# EAGLE board MySens-easyRS485-BluePill-V02-011 (EAGLE 7.6.0)
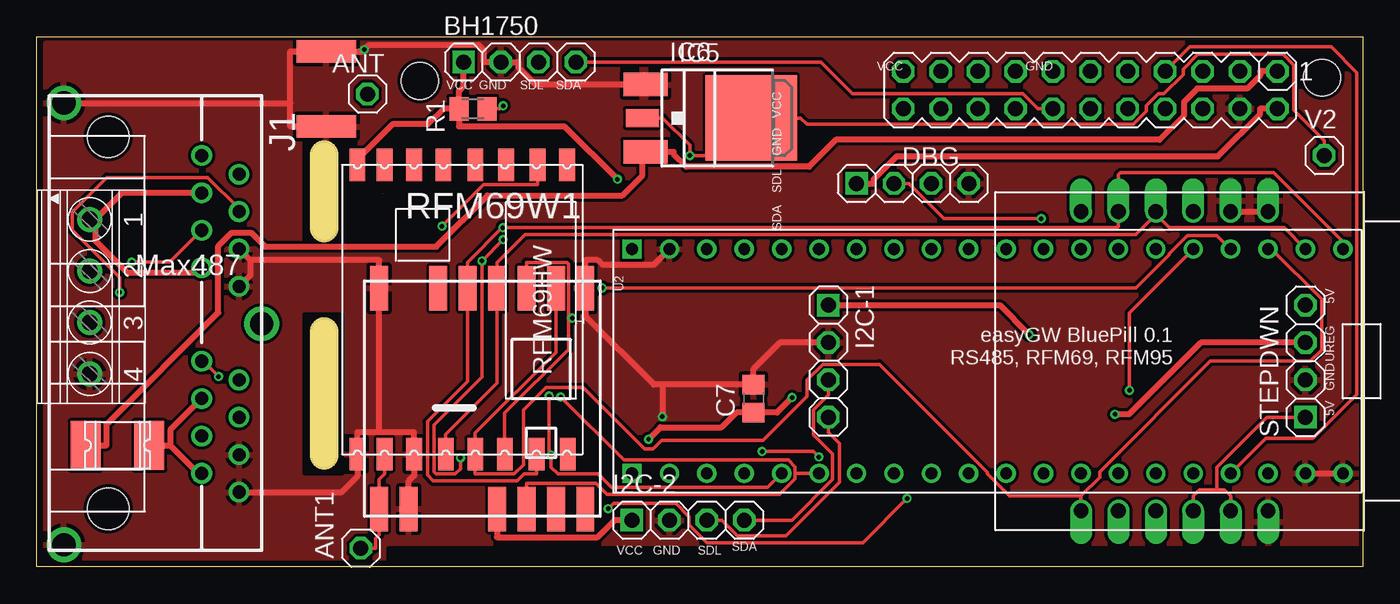
[diagram p0: board, top side]
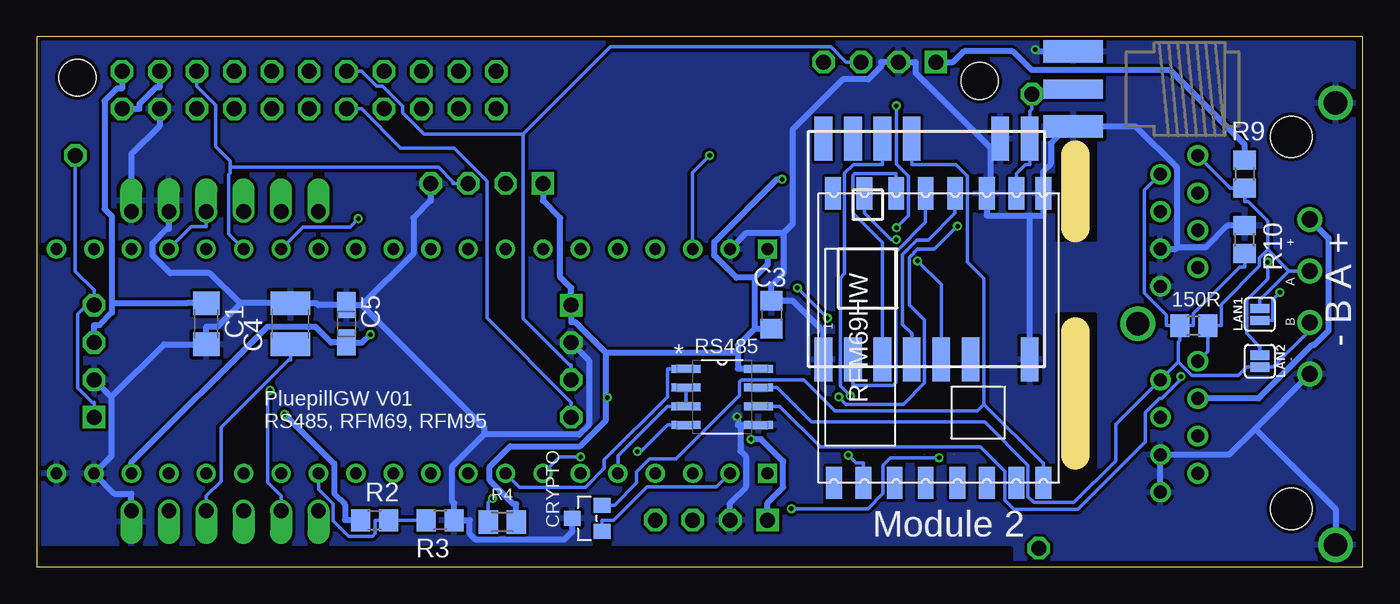
[diagram p1: board, bottom side, seen from below]

Size 90 x 36 mm. Coordinates in mm from the lower left corner, seen from the top.
Outline: 90,0 0,0 0,36 90,36 90,0
Copper layers (1*16): Top 0.035mm / dielectric 1.5mm / Bottom 0.035mm
Design rules "dirt_cheap_dirty_boards.v1": minimum track width 5mil, minimum drill 12mil, track to track 5mil, track to pad 5mil, pad to pad 5mil, via to via 5mil, smd to smd 0mil, copper to edge 10mil, drill to drill 10mil, minimum pad ring 10mil, minimum via ring 6mil, stop-mask expansion 2mil, vias tented up to drill 25mil, thermal gap 10mil
Net classes: 0 default: width 0.254 mm, clearance 0.205 mm; 1 PWR: width 0.406 mm, clearance 0.205 mm to class 0, clearance 0.205 mm
Holes 2.5 mm at 87.24,33.23 26,33
tRestrict: area 18.2,22.2 to 20.7,28.6; area 18.2,6.3 to 20.7,17.1; area 23.9,0.6 to 89.9,1.3; 1 lines
bRestrict: area 18.2,22.2 to 20.7,28.6; area 18.2,6.3 to 20.7,17.1; area 23.9,0.6 to 89.9,1.3
Milling: 2 lines

## Footprints (pad centres in the part's own frame; a part is rotated, then mirrored left to right if it is on the bottom)
1X01 = drill 1.016 octagon: 1 0,0
1X04-S = drill 1.016 square: 1 -3.81,0 | drill 1.016 octagon: 2 -1.27,0; 3 1.27,0; 4 3.81,0
C1206 = smd 1.6 x 1.8: 1 -1.4,0; 2 1.4,0
C0805 = smd 1.3 x 1.5: 1 -0.95,0; 2 0.95,0
C1210 = smd 1.6 x 2.7: 1 -1.4,0; 2 1.4,0
R/2012-12W = smd 1.75 x 1.26: + 1.275,0; - -1.275,0
SOT23 = smd 1.016 x 1.143: 1 -0.889,-1.016; 2 0.889,-1.016; 3 0,1.016
1812L = smd 2.03 x 3.3: P$1 -2.16,0; P$2 2.16,0
USR-ES1 = drill 1 pad 1.35 offset: 1 -10.16,5.715; 2 -10.16,3.175; 3 -10.16,0.635; 4 -10.16,-1.905; 5 -10.16,-4.445; 6 -10.16,-6.985; 7 10.16,-6.985; 8 10.16,-4.445; 9 10.16,-1.905; 10 10.16,0.635; 11 10.16,3.175; 12 10.16,5.715
DPACK = smd 1.6 x 3: 1 -2.28,-4.8; 3 2.28,-4.8 | smd 5.8 x 6.2: 4 0,2.38
SOT223 = smd 1.219 x 2.235: 1 -2.311,-3.099; 2 0,-3.099; 3 2.311,-3.099 | smd 3.6 x 2.2: TAB 0,3.099
RJ45_2X_NARROW_SHILDPINS_NOCASE = drill 0.889: 1-1 -11.43,6.35; 1-2 -10.16,8.89; 1-3 -8.89,6.35; 1-4 -7.62,8.89; 1-5 -6.35,6.35; 1-6 -5.08,8.89; 1-7 -3.81,6.35; 1-8 -2.54,8.89; 2-1 2.54,6.35; 2-2 3.81,8.89; 2-3 5.08,6.35; 2-4 6.35,8.89; 2-5 7.62,6.35; 2-6 8.89,8.89; 2-7 10.16,6.35; 2-8 11.43,8.89 | drill 1.575 pad 2.184: G1 -15,-3; G2 0,10.414; G3 15,-3 | hole 2.8: -12.7,0; 12.573,0
SMT-JUMPER_2_NC_PASTE_SILK = smd 0.635 x 1.27: 1 -0.406,0; 2 0.406,0
M0805 = smd 1.3 x 1.6: 1 -0.95,0; 2 0.95,0
R0805 = smd 1.3 x 1.5: 1 -0.95,0; 2 0.95,0
RFM = smd 2.184 x 1.067: ANT 19.651,2.889; DIO0 0,13.27; DIO1 0,11.143; DIO2 0,9.047; DIO3 0,6.889; DIO4 0,4.889; DIO5 0,2.889; GNDA 19.651,4.889; GNDB 19.651,1.048; MISO 19.651,9.047; MOSI 19.651,11.047; NC 19.651,15.334; NSS 19.651,13.206; RESET 0,15.27; SCK 19.651,7.048; VCC 0,1.048
SOIC127P600X175-8N = smd 1.981 x 0.533: 1 -2.464,1.905; 2 -2.464,0.635; 3 -2.464,-0.635; 4 -2.464,-1.905; 5 2.464,-1.905; 6 2.464,-0.635; 7 2.464,0.635; 8 2.464,1.905
MA11-2 = drill 1.016 octagon: 1 -12.7,-1.27; 2 -12.7,1.27; 3 -10.16,-1.27; 4 -10.16,1.27; 5 -7.62,-1.27; 6 -7.62,1.27; 7 -5.08,-1.27; 8 -5.08,1.27; 9 -2.54,-1.27; 10 -2.54,1.27; 11 0,-1.27; 12 0,1.27; 13 2.54,-1.27; 14 2.54,1.27; 15 5.08,-1.27; 16 5.08,1.27; 17 7.62,-1.27; 18 7.62,1.27; 19 10.16,-1.27; 20 10.16,1.27; 21 12.7,-1.27; 22 12.7,1.27
RFM69HCW-XXXS2 = smd 3 x 1.2: 3.3V 7.5,1; ANT 7.5,-7; DIO0 7.5,3; DIO1 7.5,5; DIO2 7.5,7; GND_1 7.5,-5; GND_2 -7.5,-7; GND_3 -7.5,7; MISO -7.5,5; MOSI -7.5,3; NSS -7.5,-1; RESET -7.5,-3; SCK -7.5,1
BLUEPILL = drill 0.8 square: P$1 -7.62,22.86; P$40 7.62,22.86 | drill 0.8: P$2 -7.62,20.32; P$3 -7.62,17.78; P$4 -7.62,15.24; P$5 -7.62,12.7; P$6 -7.62,10.16; P$7 -7.62,7.62; P$8 -7.62,5.08; P$9 -7.62,2.54; P$10 -7.62,0; P$11 -7.62,-2.54; P$12 -7.62,-5.08; P$13 -7.62,-7.62; P$14 -7.62,-10.16; P$15 -7.62,-12.7; P$16 -7.62,-15.24; P$17 -7.62,-17.78; P$18 -7.62,-20.32; P$19 -7.62,-22.86; P$20 -7.62,-25.4; P$21 7.62,-25.4; P$22 7.62,-22.86; P$23 7.62,-20.32; P$24 7.62,-17.78; P$25 7.62,-15.24; P$26 7.62,-12.7; P$27 7.62,-10.16; P$28 7.62,-7.62; P$29 7.62,-5.08; P$30 7.62,-2.54; P$31 7.62,0; P$32 7.62,2.54; P$33 7.62,5.08; P$34 7.62,7.62; P$35 7.62,10.16; P$36 7.62,12.7; P$37 7.62,15.24; P$38 7.62,17.78; P$39 7.62,20.32
SMA_EDGELAUNCH = smd 4.064 x 1.524: GND@1 2.032,-2.54; GND@2 2.032,2.54 | smd 4.064 x 1.524 bottom: GND@3 2.032,2.54; GND@4 2.032,-2.54 | smd 4.064 x 1.27: P 2.032,0
1751264 = drill 1.1 pad 1.7: 1 -5.25,-0.1; 2 -1.75,-0.1; 3 1.75,-0.1; 4 5.25,-0.1

## Placement (x,y rotation side)
ANT  [1X01]  22.45,32.12 0 top
ANT1  [1X01]  21.98,1.27 0 top
BH1750  [1X04-S]  32.78,34.29 0 top
C1  0.1uF  [C1206]  78.5,16.51 270 bottom
C3  22p  [C0805]  40.12,17.12 270 bottom
C4  10uF  [C1210]  72.78,16.51 90 bottom
C5  10uF  [R/2012-12W]  68.97,16.51 270 bottom
C7  22pF  [C0805]  48.66,11.43 90 top
CRYPTO  ATSHA204A  [SOT23]  52.64,3.3 90 bottom
DBG  [1X04-S]  59.45,26.04 0 top
F2  1812L  [1812L]  5.47,8.26 0 top
I2C-1  [1X04-S]  53.73,13.97 270 top
I2C-2  [1X04-S]  44.21,3.17 0 top
IC2  LAN-USR-ES1  [USR-ES1]  77.86,13.97 270 top
IC5  LD117ADT50TR  [DPACK]  46.12,30.48 270 top
IC6  LM1117MPX-ADJ  [SOT223]  44.21,30.48 270 top
J1  [RJ45_2X_NARROW_SHILDPINS_NOCASE]  4.84,16.51 270 top
LAN1  JUMPER-SMT_2_NC_PASTE_SILK  [SMT-JUMPER_2_NC_PASTE_SILK]  6.99,17.14 90 bottom
LAN2  JUMPER-SMT_2_NC_PASTE_SILK  [SMT-JUMPER_2_NC_PASTE_SILK]  6.99,13.97 270 bottom
R1  10k  [M0805]  29.61,31.11 180 top
R2  1M  [R0805]  67.07,3.17 0 bottom
R3  470K  [R0805]  62.62,3.17 180 bottom
R4  10k  [M0805]  58.41,3.05 0 bottom
R6  150R  [R0805]  11.46,16.38 180 bottom
R9  330R  [R0805]  8.02,26.67 270 bottom
R10  330R  [R0805]  8.02,22.23 90 bottom
RFM69W  RFM69HW  [RFM]  20.62,5.71 90 bottom
RFM69W1  RFM69HW  [RFM]  20.71,27.3 270 top
RS1  MAX487ECSA+  [SOIC127P600X175-8N]  43.48,11.54 0 bottom
STEPDWN  [1X04-S]  86.12,13.97 90 top
SV2  [MA11-2]  71.52,32.38 180 top
U1  RFM69HCW  [RFM69HCW-XXXS2]  29.61,21.59 90 bottom
U2  RFM69HCW  [RFM69HCW-XXXS2]  30.24,11.43 270 top
U$4  BLUEPILL  [BLUEPILL]  63.26,13.97 90 top
V2  [1X01]  87.39,27.94 0 top
X2  [SMA_EDGELAUNCH]  17.62,32.45 180 bottom
X3  1751264  [1751264]  3.69,18.35 270 top

## Library data of the parts
ANT ANT1 V2 = pinhead
BH1750 DBG I2C-1 I2C-2 STEPDWN = pinhead-2
C1 C3-C5 C7 R1-R4 R6 R9 R10 = rcl
CRYPTO = Sensor
F2 = ptc-littlefuse
IC2 = Martin-Communication
IC5 = v-reg
IC6 = lm1117
J1 = RJ45
LAN1 LAN2 = SparkFun-Jumpers
RFM69W RFM69W1 = hoperf
RS1 = Maxim_By_element14_Batch_1; MPN: MAX487ECSA+; OC_FARNELL: 9724532; OC_NEWARK: 68K4803; PACKAGE: SOIC-8; SUPPLIER: Maxim
SV2 = con-Pinheader; OC_FARNELL: unknown; OC_NEWARK: unknown
U1 U2 = doug
U$4 = stm32duino boards
X2 = adafruit
X3 = con-phoenix-350; MPN: 1751264; OC_FARNELL: unknown; OC_NEWARK: 10R0934

## Nets
3V3: CRYPTO.2 RFM69W.VCC U1.3.3V
4: J1.1-4 LAN1.1
5: J1.1-5 LAN2.1
5V: C4.1 IC2.10 IC2.11 IC5.4 IC6.2 IC6.TAB STEPDWN.1 STEPDWN.4 U$4.P$38 V2.1
A: J1.1-1 J1.2-1 LAN1.2 R6.1 R9.2 RS1.6 X3.2
A0: SV2.21
A1: SV2.22
A2: SV2.16
A3: SV2.15
A4: BH1750.4 I2C-1.4 I2C-2.3 SV2.14
A5: BH1750.3 I2C-1.3 I2C-2.4 SV2.13
A7: SV2.8
ANT: ANT.1 RFM69W.ANT U1.ANT X2.P
ANT1: ANT1.1 RFM69W1.ANT U2.ANT
B: J1.1-2 J1.2-2 LAN2.2 R6.2 R10.1 RS1.7 X3.3
CSN: R4.1 RFM69W.NSS U1.NSS
CSN1: U$4.P$9
CSN2: IC2.5 R1.1 RFM69W1.NSS U2.NSS U$4.P$21
D2: SV2.9
D3: SV2.10
D5: SV2.11
D6: SV2.12
D10_SS: SV2.20
D11_MOSI: SV2.17
D12_MISO: SV2.18
D13_SCK: SV2.19
GND [PWR]: BH1750.2 C1.2 C3.1 C4.2 C5.- C7.2 CRYPTO.3 DBG.4 I2C-1.2 I2C-2.2 IC2.1 IC2.2 IC2.12 IC5.1 IC6.1 J1.1-6 J1.1-8 J1.2-6 J1.2-8 J1.G1 J1.G3 R3.1 R10.2 RFM69W1.GNDA RFM69W1.GNDB RFM69W.GNDA RFM69W.GNDB RS1.5 STEPDWN.2 SV2.4 U1.GND_1 U1.GND_2 U1.GND_3 U2.GND_1 U2.GND_2 U2.GND_3 U$4.P$19 U$4.P$20 U$4.P$39 X2.GND@1 X2.GND@2 X2.GND@3 X2.GND@4 X3.4
IRQ: RFM69W.DIO0 RS1.2 RS1.3 U1.DIO0 U$4.P$5
IRQ2: RFM69W1.DIO0 U2.DIO0 U$4.P$6
MISO: RFM69W.MISO U1.MISO
MISO1: U$4.P$11
MISO2: IC2.7 RFM69W1.MISO U2.MISO U$4.P$23
MOSI: RFM69W.MOSI U1.MOSI
MOSI1: U$4.P$12
MOSI2: IC2.3 RFM69W1.MOSI U2.MOSI U$4.P$24
N$1: U1.RESET
N$4: U2.DIO2
N$8: U2.DIO1
N$9: U2.RESET
N$12: U$4.P$3
N$13: U$4.P$4
N$14: U1.DIO2
N$15: U1.DIO1
N$25: U$4.P$14
N$33: IC2.6
N$35: U$4.P$37
N$36: U$4.P$36
N$39: U$4.P$33
N$40: U$4.P$32
N$41: U$4.P$31
N$42: U$4.P$30
N$43: U$4.P$29
N$44: U$4.P$28
PB0: R2.2 R3.2 U$4.P$13
PC13: CRYPTO.1 U$4.P$2
RESET: SV2.7 U$4.P$17
RX0: SV2.6
RX1: DBG.2 U$4.P$27
RX2: RS1.1 U$4.P$8
SCK: RFM69W.SCK U1.SCK
SCK1: U$4.P$10
SCK2: IC2.4 RFM69W1.SCK U2.SCK U$4.P$22
SCL1: U$4.P$34
SCL2: U$4.P$15
SDA1: U$4.P$35
SDA2: U$4.P$16
TX1: DBG.3 SV2.5 U$4.P$26
TX2: RS1.4 U$4.P$7
UREG [PWR]: C1.1 F2.P$1 IC5.3 IC6.3 R2.1 STEPDWN.3 SV2.1
VCC [PWR]: BH1750.1 C3.2 C5.+ C7.1 DBG.1 I2C-1.1 I2C-2.1 R1.2 R4.2 R9.1 RFM69W1.VCC RS1.8 SV2.2 SV2.3 U2.3.3V U$4.P$18 U$4.P$40
VIN [PWR]: F2.P$2 J1.1-3 J1.1-7 J1.2-3 J1.2-7 X3.1
WIZ_RST: IC2.8 U$4.P$25

## Tracks (layer width: path | path; a pad name or v marks a point on that pad's centre or on a via)
3V3
  Bottom 0.254: 25.71,11.04 26.17,10.58 35.81,10.58 37.92,12.7 42.16,12.7 42.3,12.57 42.3,11.63 46.61,7.32 48.41,7.32 49.29,6.44 49.29,5.7 50.8,4.19 CRYPTO.2 | 25.71,11.04 21.73,7.06 21.67,7.06 RFM69W.VCC | 25.71,11.04 25.71,19.59 26.84,20.72 26.84,26.56 27.62,27.34 30.61,27.34 U1.3.3V
4  (via drill 0.3 pad 0.61)
  Top 0.254: v5.62,18.65 5.62,19.67 2.4,22.88 2.4,24.1 4.75,26.45 11.6,26.45 13.73,24.32 J1.1-4
  Bottom 0.254: v5.62,18.65 6.1,18.17 6.1,16.74 LAN1.1
5  (via drill 0.3 pad 0.61)
  Top 0.254: v6.45,20.7 9.03,20.7 J1.1-5
  Bottom 0.254: LAN2.1 6.99,14.95 7.87,15.84 7.87,18.11 6.45,19.54 v6.45,20.7
5V  (via drill 0.3 pad 0.61)
  Top 0.254: 80.09,5.25 78.93,5.25 78.5,4.82 IC2.10 | 80.09,5.25 80.61,5.25 81.04,4.82 IC2.11 | STEPDWN.1 83.48,10.16 80.09,6.77 80.09,5.25 | IC6.2 42.48,30.48 44.33,28.64 v44.33,27.94 46.83,27.94 47.31,28.43 IC6.TAB IC5.4 51.85,30.48 52.27,30.06 74.45,30.06 75.33,30.93 75.33,31.32 76.14,32.13 76.51,32.13 77.82,33.44 77.82,33.81 78.82,34.81 84.61,34.81 85.33,34.09 85.33,31.01 87.39,28.96 V2.1
  Bottom 0.254: C4.1 72.78,14.06 72.92,14.06 77.49,9.48 77.49,5.83 78.5,4.82 IC2.10 | U$4.P$38 45.48,26.79 v44.33,27.94 | STEPDWN.1 86.12,11.18 86.25,11.18 87.22,12.15 87.22,17.19 86.12,18.29 | 86.12,18.29 86.12,18.8 87.39,20.07 V2.1 | STEPDWN.4 86.12,18.29
A  (via drill 0.3 pad 0.61)
  Top 0.254: J1.2-1 11.3,13.97 v12.34,12.93
  Bottom 0.254: 6.44,21.54 5.01,20.1 | 6.44,21.54 6.44,23.5 7.76,24.82 8.02,24.82 R9.2 8.52,25.72 9.02,25.72 9.02,25.77 J1.1-1 | 6.44,21.54 7,20.98 7,20.43 9.61,17.82 9.61,16.38 R6.1 10.52,14.64 J1.2-1 | RS1.6 39.59,10.91 36.82,8.14 25.95,8.14 24.3,6.49 24.3,4.52 23.68,3.91 19.33,3.91 14.76,8.47 14.76,10.48 13.81,11.43 13.63,11.43 12.34,12.72 v12.34,12.93 | 5.01,20.1 6.99,18.12 LAN1.2 | X3.2 5.01,20.1
A4
  Top 0.254: SV2.14 67.96,31.11 66.94,32.13 55.37,32.13 53.22,34.29 BH1750.4 | I2C-2.3 46.5,3.17 47.56,2.11 50.84,2.11 54.48,5.75 54.48,8.4 53.73,9.14 I2C-1.4
  Bottom 0.254: I2C-1.4 53.73,11.18 59.45,16.89 59.45,26.22 61.68,28.45 65.29,28.45 67.96,31.11 SV2.14
A5
  Top 0.254: 49.04,3.17 51.26,3.17 54.02,5.93 54.02,7.67 52.72,8.97 52.72,10.67 53.73,11.68 I2C-1.3 | 49.04,3.17 | I2C-2.4 49.04,3.17
  Bottom 0.254: I2C-1.3 53.73,13.72 53.84,13.72 56.99,16.87 56.99,29.4 | 56.99,29.4 51.07,35.32 36.09,35.32 35.07,34.29 BH1750.3 | 56.99,29.4 63.7,29.4 65.17,30.86 65.17,31.29 66.51,32.64 66.94,32.64 67.96,33.66 SV2.13
ANT  (1 unrouted)
  Bottom 0.254: RFM69W.ANT 23.51,26.71 22.89,27.34 22.61,27.34 U1.ANT 22.61,30.94 22.45,31.1 ANT.1 21.43,32.12 21.09,32.45 X2.P
ANT1  (1 unrouted)
  Top 0.254: RFM69W1.ANT 23.6,6.31 23.24,5.94 U2.ANT 23.24,2.18 23,1.94 23,1.27 ANT1.1
B
  Bottom 0.254: 16.77,9.66 16.77,7.2 19.59,4.37 22.32,4.37 22.72,4.77 22.72,6.91 25.65,9.84 37.42,9.84 39.77,12.18 RS1.7 | 16.77,9.66 | 16.77,9.66 J1.2-2 12.51,13.92 | R6.2 13.32,16.38 13.32,17.11 14.82,18.61 14.82,25.58 J1.1-2 | R6.2 12.3,16.38 11.51,16.38 11.51,17.21 8.35,20.37 8.02,20.37 R10.1 | R6.2 12.41,16.15 12.41,15.38 12.51,15.28 12.51,13.92 | 12.51,13.92 11.61,13.01 8.43,13.01 7.87,13.56 LAN2.2 6.1,13.56 3.59,16.07 X3.3
CSN  (via drill 0.3 pad 0.61)  (1 unrouted)
  Top 0.254: v31.66,22.23 v30.22,20.79 30.22,12.89 26.98,9.64 26.98,6.44 27.11,6.31 28.4,6.31 28.76,6.67 v28.76,7.41 | v31.66,22.23 | v31.66,22.23 | v38.78,3.96 39.13,4.31 43.37,4.31 44.27,3.42 44.27,2.87 45.48,1.65 56.07,1.65 v59.08,4.65
  Bottom 0.254: v31.66,22.23 32.03,22.23 33.83,24.02 RFM69W.NSS | v59.08,4.65 59.35,4.37 R4.1 | v28.76,7.41 32.05,7.41 32.55,6.91 32.55,5 33.6,3.96 v38.78,3.96 | v30.22,20.79 28.61,19.17 U1.NSS
CSN2  (via drill 0.3 pad 0.61)  (1 unrouted)
  Top 0.254: U$4.P$21 88.66,22.1 83.98,26.78 73.55,26.78 73.42,26.65 IC2.5 73.42,23.12 73.33,23.04 v31.65,23.04 31.59,23.04 29.24,20.68 U2.NSS 29.24,12.6 26.52,9.87 26.52,6.24 26.91,5.84 32.59,5.84 33.06,6.31 33.92,6.31 RFM69W1.NSS | v31.66,31.32 31.46,31.11 R1.1
  Bottom 0.254: v31.66,31.32 31.66,27.35 30.83,26.53 30.83,23.85 v31.65,23.04
GND  (via drill 0.3 pad 0.61)
  Top 0.406: 42.46,12.38 41.88,12.38 37.24,17.02 U2.GND_3 37.24,20.84 38.08,20.84 38.41,20.51 41.86,20.51 U$4.P$39 | 42.46,12.38 47.5,12.38 C7.2 48.66,13.44 50.46,15.24 I2C-1.2 | 42.46,12.38 v42.46,10.19 | U$4.P$19 U$4.P$20 | J1.2-8 20.69,5.08 21.76,6.15 RFM69W1.GNDB 21.76,9.15 23.24,9.15 | 23.24,9.15 25.6,9.15 RFM69W1.GNDA 25.6,6.15 25.55,6.15 25.24,5.84 U2.GND_1 | 23.24,9.15 U2.GND_2 23.24,20.84 14.48,20.84 | IC5.1 41.28,32.79 IC6.1 33.82,32.79 32.68,33.93 32.68,34.29 BH1750.2 30.34,34.29 30.34,35.12 30,35.46 22.56,35.46 v22.23,35.13 22.09,34.99 21.84,34.99 X2.GND@1 17.21,34.99 17.21,31.51 | IC2.2 IC2.1 | 14.48,20.84 J1.1-6 | 14.48,20.84 14.48,19.8 J1.1-8 | 17.21,31.51 17.21,29.91 X2.GND@2 | J1.G1 17.21,31.51
  Bottom 0.406: 39.33,22.66 38.69,23.29 38.69,29.7 35.27,33.12 33.56,33.12 32.68,34 32.68,34.29 BH1750.2 30.34,34.29 30.34,33.54 25.25,28.45 | I2C-2.2 42.94,4.34 41.87,5.41 41.87,7.51 42.23,7.88 42.23,9.64 | 42.23,9.64 42.41,9.64 42.41,10.14 v42.46,10.19 | 42.23,9.64 42.17,9.64 RS1.5 | U1.GND_3 36.6,16 38.68,18.07 C3.1 40.12,19.13 39.33,19.92 39.33,22.66 | 39.33,22.66 41.87,22.66 U$4.P$39 | 67.94,17.79 64.43,21.29 64.43,23.69 63.26,24.86 DBG.4 | 59.63,8.99 61.83,6.79 61.83,4.49 61.67,4.33 R3.1 60.62,3.17 60.62,2.25 60.21,1.84 54.2,1.84 53.66,2.38 CRYPTO.3 | I2C-1.2 52.53,14.03 52.53,9.65 53.19,8.99 59.63,8.99 | 67.94,17.79 59.63,9.48 59.63,8.99 | 12.6,21.69 12.6,27.1 15.4,29.91 X2.GND@2 20.03,29.91 21.17,28.77 21.17,27.36 21.67,26.87 RFM69W.GNDB 21.67,23.87 22.61,23.87 | 7.3,9.39 9.07,7.62 J1.2-6 J1.2-8 | X3.4 7.3,9.39 | 7.3,9.39 1.84,3.92 J1.G3 | 76.18,17.88 78.25,19.95 80.94,19.95 82.15,21.16 82.15,21.99 81.17,22.97 81.04,22.97 IC2.2 | 76.18,17.88 76.14,17.91 C4.2 71.03,17.91 70.9,17.79 C5.- 68.46,17.79 67.94,17.79 | 76.18,17.88 77.73,16.32 78.5,16.32 C1.2 81.37,15.11 84.95,11.53 | 25.51,24.62 25.25,24.88 25.25,28.45 | 25.25,28.45 | U1.GND_1 25.25,28.45 | 25.51,24.62 25.51,23.87 22.61,23.87 | RFM69W.GNDA 25.51,24.62 | v22.23,35.13 22.09,34.99 X2.GND@1 | 22.61,23.87 | 22.61,23.87 | 22.61,23.87 22.61,16 U1.GND_2 | 84.95,11.53 84.95,7.52 U$4.P$19 84.74,4.97 83.58,4.97 IC2.12 | STEPDWN.2 84.95,11.53 | J1.1-6 12.69,21.59 12.6,21.69 | 12.6,21.69 10.66,21.69 9.17,23.18 R10.2 | SV2.4 81.67,29.95 83.58,28.04 IC2.1
  pour Top: 0.64,35.56 89.53,35.56 89.53,0.64 0.64,0.64
  pour Bottom: 0.64,35.56 89.53,35.56 89.53,0.64 0.64,0.64
IRQ  (via drill 0.3 pad 0.61)
  Top 0.254: v34.79,11.61 34.79,7.72 v34.92,7.58 34.92,6.77 35.38,6.31 38.08,6.31 39,5.39 49.6,5.39 U$4.P$5
  Bottom 0.254: U1.DIO0 32.6,27.34 34.56,27.34 35.17,26.73 35.17,19.91 35.46,19.62 35.46,12.28 v34.79,11.61 | v34.92,7.58 34.4,7.06 33.89,7.06 RFM69W.DIO0 | RS1.2 RS1.3 47.18,10.91 50.56,7.53 U$4.P$5
IRQ2  (via drill 0.3 pad 0.61)
  Top 0.254: U2.DIO0 33.24,5.68 37.95,5.68 38.7,4.93 50.42,4.93 51.47,5.97 51.47,6.35 | 51.47,6.35 51.47,6.8 51.01,7.26 39.85,7.26 v35.56,11.54 | U$4.P$6 51.47,6.35 | RFM69W1.DIO0 33.98,25.96 30.32,25.96 v27.5,23.14
  Bottom 0.254: v35.56,11.54 35.07,11.04 31.18,11.04 29.74,12.48 29.74,16.75 30.78,17.8 30.78,21.02 30.22,21.58 29.05,21.58 v27.5,23.14
MISO  (1 unrouted)
  Bottom 0.254: 29.67,23.43 31.7,21.4 31.7,12.53 31.89,12.34 34.6,12.34 U1.MISO | 29.67,23.43 | 29.67,23.43 RFM69W.MISO
MISO2  (1 unrouted)
  Top 0.254: 70.88,4.82 66.02,4.82 64.53,6.3 64.53,6.43 57.2,13.76 53.35,13.76 52.28,12.7 52.28,11.57 49.3,8.59 42.41,8.59 41.84,8.03 41.26,8.03 37.09,12.19 34.56,12.19 33.03,10.66 33.03,6.94 32.4,6.31 29.76,6.31 RFM69W1.MISO 29.76,8.21 29.76,9 29.76,9.09 35.24,14.57 U2.MISO | U$4.P$23 83.81,21.59 87.22,18.18 87.22,14.73 86.45,13.97 79.66,13.97 72.15,6.46 72.15,6.09 70.88,4.82 | IC2.7 70.88,4.82
MOSI  (1 unrouted)
  Bottom 0.254: RFM69W.MOSI 31.67,26.71 34.49,26.71 34.61,26.59 34.61,24.02 32.6,22.01 U1.MOSI
MOSI2  (via drill 0.3 pad 0.61)  (1 unrouted)
  Top 0.254: U$4.P$24 80.11,22.52 78.09,22.52 76.87,21.29 76.87,21.21 74.61,18.94 v38.38,18.94 | 36.1,16.9 36.1,14.78 31.76,10.44 RFM69W1.MOSI | 36.1,16.9 36.1,20.58 35.99,20.68 33.24,20.68 U2.MOSI | v36.34,16.9 36.1,16.9
  Bottom 0.254: v36.34,16.9 v38.38,18.94 | IC2.3 78.5,23.12 79.51,23.12 U$4.P$24
PB0
  Bottom 0.254: U$4.P$13 70.88,5.28 69.87,4.27 69.87,3.12 68.84,2.09 67.2,2.09 67.02,2.27 67.02,3.17 R2.2 R3.2
PC13
  Bottom 0.254: CRYPTO.1 51.62,3.17 50.86,3.17 48.59,5.44 43.85,5.44 U$4.P$2
RESET
  Top 0.254: U$4.P$17 83.42,8.73 86.61,8.73 89.61,11.73 89.61,33.57 87.86,35.31 78.25,35.31 SV2.7
RX1  (via drill 0.3 pad 0.61)
  Top 0.254: DBG.2 59.2,26.04 61.59,23.64 v68.18,23.64
  Bottom 0.254: U$4.P$27 71.93,23.08 68.73,23.08 v68.18,23.64
RX2
  Bottom 0.254: U$4.P$8 57.23,5.4 52.77,5.4 51.48,6.68 51.48,7.26 47.18,11.56 47.18,13.45 RS1.1
SCK  (1 unrouted)
  Bottom 0.254: U1.SCK 30.61,15.84 31.24,16.48 31.24,21.21 30.25,22.2 29.48,22.2 27.67,24.02 RFM69W.SCK
SCK2  (1 unrouted)
  Top 0.254: U$4.P$22 84.68,23.03 76.86,23.03 75.96,23.93 | 75.96,23.93 74.61,22.58 33.13,22.58 31.24,20.68 U2.SCK 31.24,12.48 27.76,9 RFM69W1.SCK | IC2.4 75.96,23.93
TX1
  Bottom 0.254: 76.88,27.14 76.88,27.56 77.86,28.55 77.86,31.37 79.14,32.64 SV2.5 | U$4.P$26 76.98,22.61 76.98,26.63 76.88,26.73 76.88,27.14 | 76.88,27.14 62.74,27.14 61.74,26.14 61.74,26.04 DBG.3
TX2  (via drill 0.3 pad 0.61)
  Top 0.254: v53.08,7.47 52.7,7.84 v49.23,7.84
  Bottom 0.254: RS1.4 47.18,9.64 48.98,7.84 v49.23,7.84 | U$4.P$7 54.52,7.47 v53.08,7.47
UREG  (via drill 0.3 pad 0.61)
  Top 0.406: F2.P$1 4.74,8.26 4.74,9.68 12.32,17.27 12.32,21.79 13.23,22.7 14.54,22.7 15.49,21.75 27.12,21.75 30.59,25.22 39.74,25.22 41.11,26.59 IC6.3 41.28,28.17 IC5.3 43.22,28.2 43.22,28.04 44.09,27.17 52.42,27.17 54.26,29 76.21,29 77.86,30.66 77.86,31.57 78.78,32.48 82.17,32.48 83.05,33.36 83.05,33.66 SV2.1 | STEPDWN.3 79.02,15.24 74.14,10.36 v73.18,10.36
  Bottom 0.406: R2.1 69.08,3.17 69.08,4.23 69.82,4.97 69.82,7 v73.18,10.36 | 84.91,17.91 84.91,17.26 85.76,16.41 86.12,16.41 STEPDWN.3 | 84.91,17.91 84.91,23.82 85.4,24.31 85.4,31.65 84.57,32.48 84.22,32.48 SV2.1 | 84.91,17.91 79.81,17.91 C1.1
VCC  (via drill 0.3 pad 0.61)
  Top 0.406: R1.2 28.66,29.91 35.82,29.91 v39.41,26.32 | v41.52,8.66 42.33,9.47 46.49,9.47 47.5,10.48 C7.1 50.24,10.48 v51.26,11.5 | I2C-2.1 39.23,3.17 38.08,2.02 31.24,2.02 U2.3.3V | R1.2 28.66,32.32 28.97,32.64 BH1750.1 | SV2.2 83.05,31.11 83.05,30.76 80.17,27.89 58.37,27.89 56.81,26.33 56.81,26.04 DBG.1 | I2C-1.1 65.36,17.78 v67.36,15.78 | R1.2 27.6,31.11 26.54,30.06 24.14,30.06 21.76,27.68 RFM69W1.VCC
  Bottom 0.406: 42.41,14.53 42.41,13.45 RS1.8 | 41.28,16.18 42.41,15.04 42.41,14.53 | 42.41,14.53 51.36,14.53 | 51.36,14.53 53.44,16.61 53.73,16.61 I2C-1.1 53.73,18.95 54.47,19.68 54.47,23.69 55.64,24.86 DBG.1 | 51.36,11.5 51.36,14.53 | 51.36,11.5 v51.26,11.5 | 51.36,11.5 51.36,9.95 53.13,8.19 57.88,8.19 59.25,6.81 59.25,5.89 57.62,4.26 57.45,4.26 R4.2 | 41.28,19.65 41.28,16.18 | 41.28,19.65 40.4,20.53 U$4.P$40 | 41.28,19.65 42.52,19.65 44.02,21.14 44.02,22.07 39.76,26.32 v39.41,26.32 | I2C-2.1 40.4,4.34 39.34,5.41 39.34,7.17 40.83,8.66 v41.52,8.66 | C3.2 41.28,16.18 | v67.36,15.78 67.39,15.78 67.94,15.23 C5.+ 70.01,15.23 71.1,16.32 74.34,16.32 83.58,7.08 U$4.P$18 | SV2.2 83.05,31.11 83.05,31.44 81.92,32.56 81.67,32.56 SV2.3 | BH1750.1 27.8,34.29 27.07,35.02 23.75,35.02 22.46,33.74 13.07,33.74 8.02,28.68 R9.1
VIN
  Top 0.406: 3.96,23.6 3.96,22.17 6.15,19.99 10.86,19.99 J1.1-7 | J1.1-3 5.76,25.4 3.96,23.6 | X3.1 3.96,23.6 | J1.2-3 9.06,9.3 9.06,8.26 | F2.P$2 9.06,8.26 | J1.2-7 10.96,6.35 9.06,8.26
  Bottom 0.406: X3.1 2.33,22.34 2.33,16.03 3.29,15.07 3.44,15.07 7.08,11.43 J1.2-3
WIZ_RST  (via drill 0.3 pad 0.61)
  Top 0.254: U$4.P$25 74.17,17.25 v74.17,12
  Bottom 0.254: IC2.8 73.42,4.82 74.34,5.74 74.34,11.82 v74.17,12

## Text on the board
tNames: VCC | GND | VCC | GND | SDL | SDA | VCC | GND | SDL | SDA | Max487 | 5V | easyGW BluePill 0.1 / RS485, RFM69, RFM95 | UREG | GND | 5V | SDA | VCC | GND | SDL
bNames: 150R | - B A + | - B A + | RS485 | PluepillGW V01 / RS485, RFM69, RFM95 | Module 2